# EAGLE board Telemetry Board rev0 (EAGLE 7.6.0)
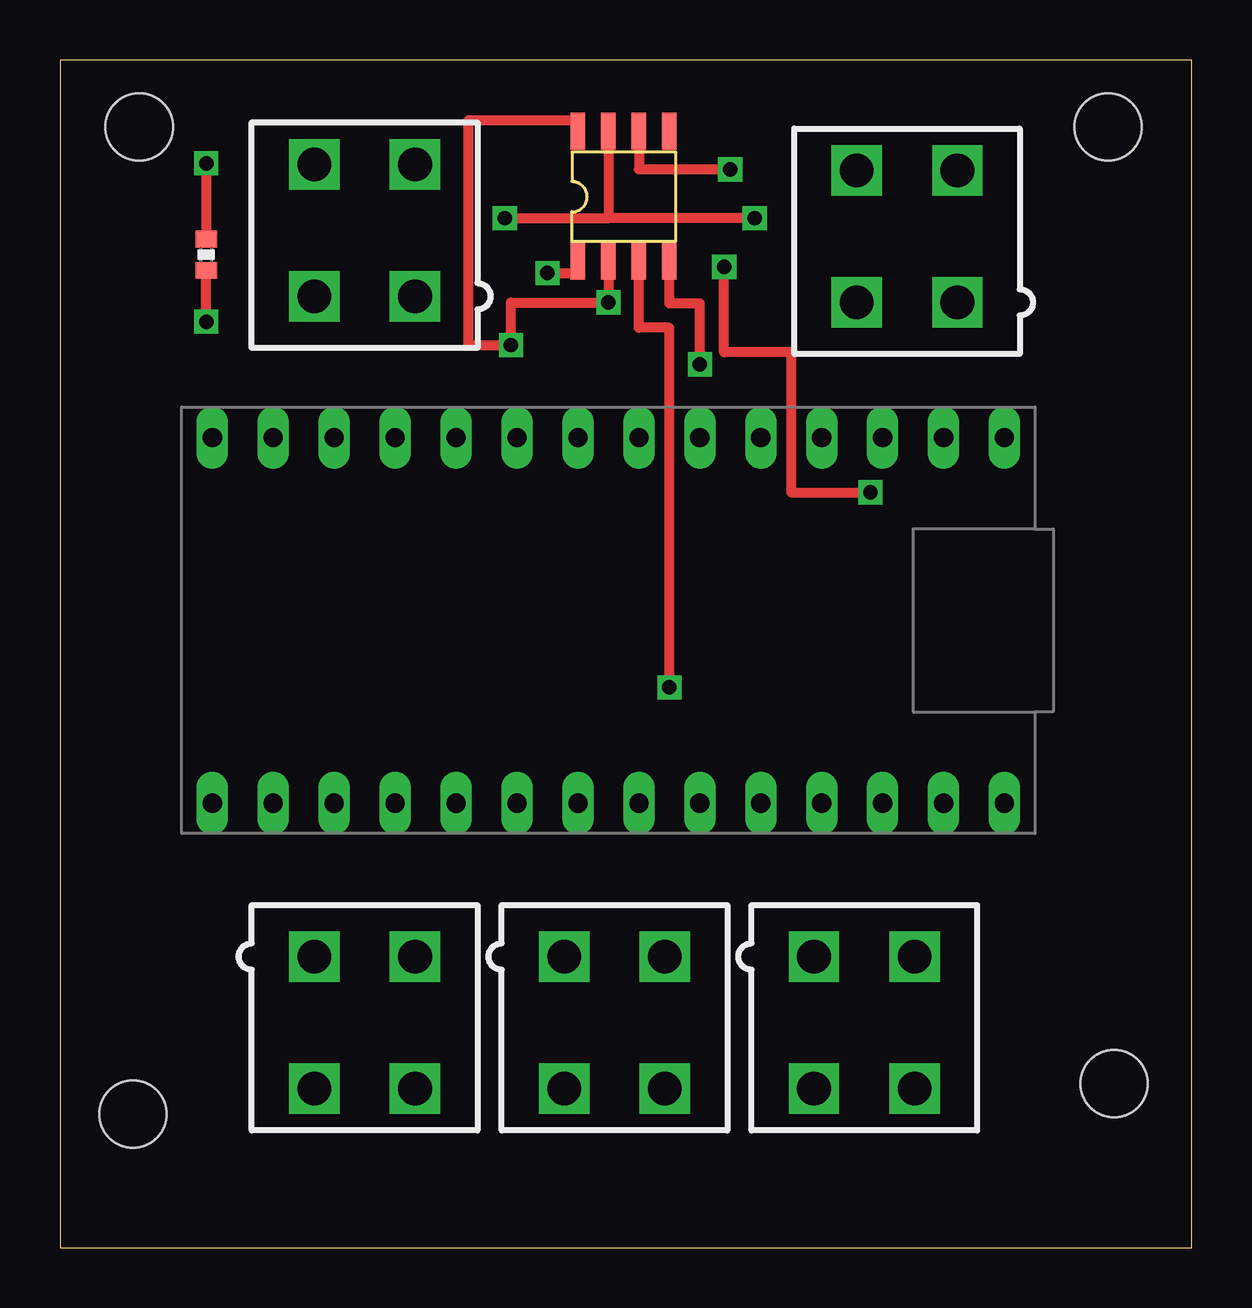
[diagram p0: board, top side]
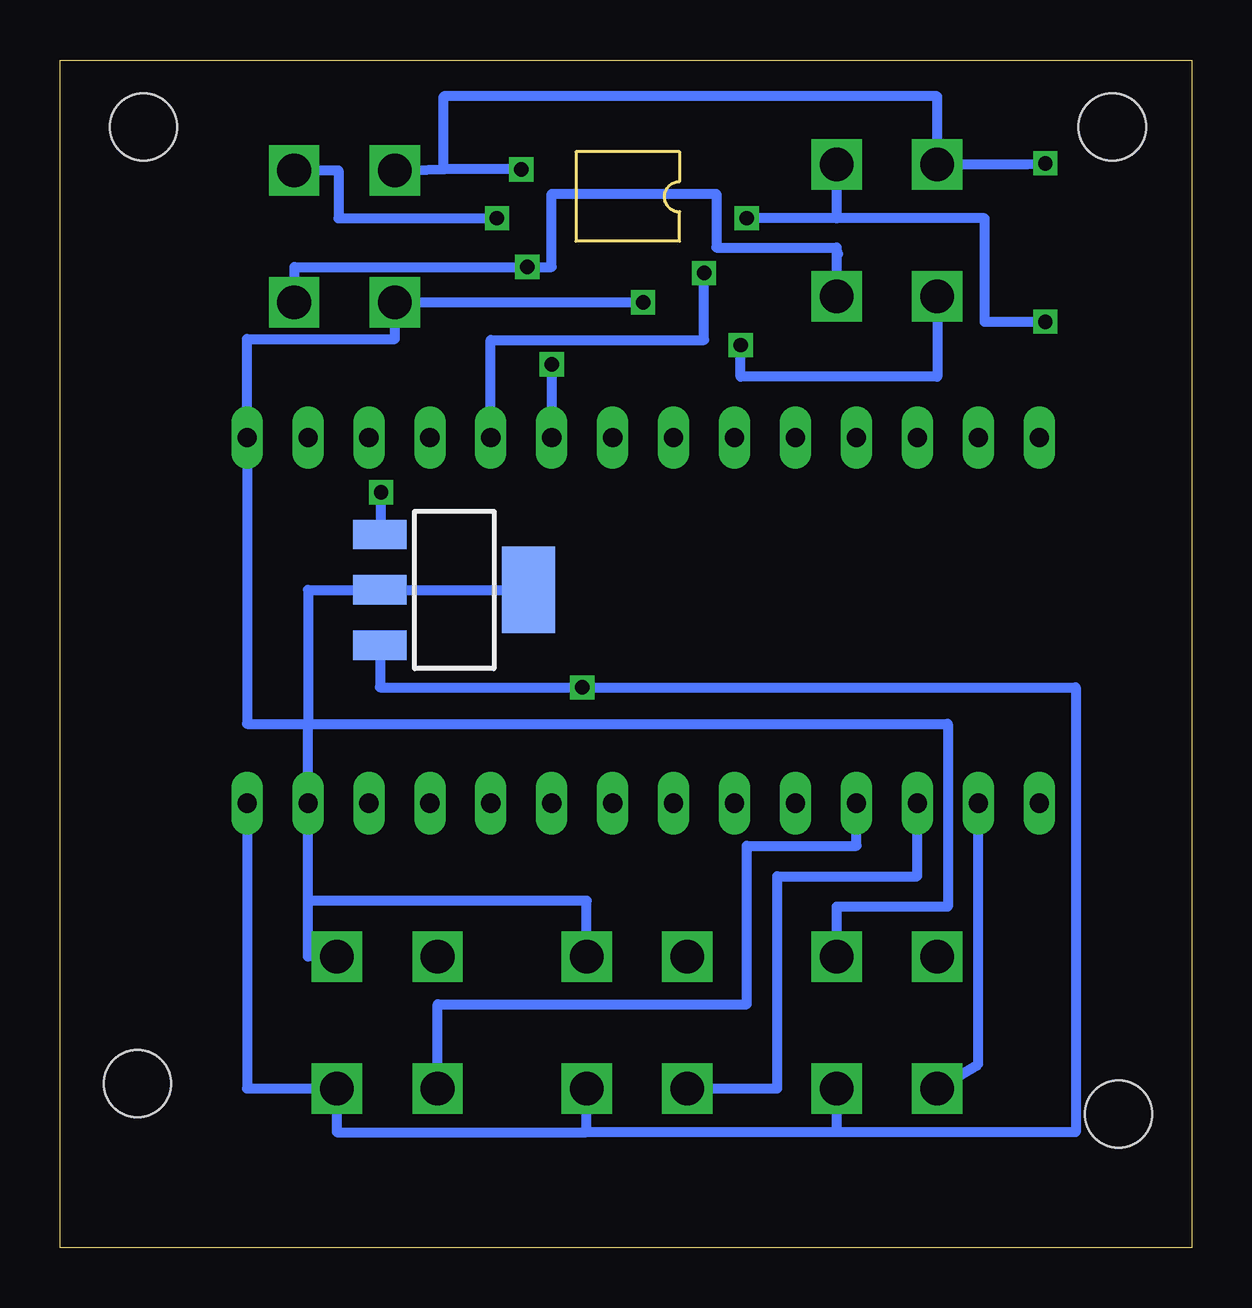
[diagram p1: board, bottom side, seen from below]

Size 47.17 x 49.52 mm. Coordinates in mm from the lower left corner, seen from the top.
Outline: 0,0 47.17,0 47.17,49.52 0,49.52 0,0
Copper layers (1*16): Top 0.035mm / dielectric 1.5mm / Bottom 0.035mm
Design rules "default": minimum track width 10mil, minimum drill 24mil, track to track 8mil, track to pad 8mil, pad to pad 8mil, via to via 8mil, smd to smd 8mil, copper to edge 40mil, drill to drill 8mil, minimum pad ring 10mil, minimum via ring 8mil, stop-mask expansion 4mil, vias tented up to drill 0mil, thermal gap 10mil
Holes 2.8 mm at 3.3,46.74 3.05,5.59 43.69,46.74 43.94,6.86

## Footprints (pad centres in the part's own frame; a part is rotated, then mirrored left to right if it is on the bottom)
0402-RES = smd 0.7 x 0.9: 1 -0.65,0; 2 0.65,0
MINIFIT_5566-4 = drill 1.4 square: 1 2.1,-2.75; 2 -2.1,-2.75; 3 2.1,2.75; 4 -2.1,2.75
TEENSY_3.2_SIMPLE = drill 0.8 long: 3.3V 16.51,29.21; A0 16.51,3.81; A1 16.51,6.35; A2 16.51,8.89; A3 16.51,11.43; A4 16.51,13.97; A5 16.51,16.51; A6 16.51,19.05; A7 16.51,21.59; A8 16.51,24.13; A9 16.51,26.67; AGND 16.51,31.75; D0(RX1) 1.27,31.75; D1(TX1) 1.27,29.21; D2 1.27,26.67; D3(CANTX) 1.27,24.13; D4(CANRX) 1.27,21.59; D5 1.27,19.05; D6 1.27,16.51; D7(RX3) 1.27,13.97; D8(TX3) 1.27,11.43; D9(RX2) 1.27,8.89; D10(TX2) 1.27,6.35; D11 1.27,3.81; D12 1.27,1.27; D13 16.51,1.27; GND 1.27,34.29; VIN 16.51,34.29
SOIC08 = smd 0.6 x 1.55: 1 0,0; 2 1.27,0; 3 2.54,0; 4 3.81,0; 5 3.81,5.4; 6 2.54,5.4; 7 1.27,5.4; 8 0,5.4
SOT223 = smd 1.219 x 2.235: 1 -2.311,-3.099; 2 0,-3.099; 3 2.311,-3.099 | smd 3.6 x 2.2: 4 0,3.099

## Placement (x,y rotation side)
120  [0402-RES]  6.1,41.4 270 top
ADAD  MINIFIT_5566-4  [MINIFIT_5566-4]  12.7,42.42 0 top
U$1  TEENSY_3.2_SIMPLE  [TEENSY_3.2_SIMPLE]  5.08,35.05 270 top
U$2  MCP2551SOIC  [SOIC08]  21.59,41.15 0 top
U$3  [SOT223]  30.73,27.43 270 bottom
X1  Suspension Sensor  [MINIFIT_5566-4]  33.53,9.4 180 top
X2  Wheel Sensor  [MINIFIT_5566-4]  12.7,9.4 180 top
X3  Tire Temperature Sensor  [MINIFIT_5566-4]  23.11,9.4 180 top
X5  MINIFIT_5566-4  [MINIFIT_5566-4]  35.31,42.16 0 top

## Library data of the parts
120 = HyTech
ADAD X1-X3 X5 = HyTechDevices; OC_FARNELL: unknown; OC_NEWARK: unknown
U$1-U$3 = HyTechDevices

## Nets
N$1: ADAD.1 U$3.1 X5.1
N$3: 120.2 ADAD.3 U$2.7 X5.3
N$4: 120.1 ADAD.4 U$2.6 X5.4
N$6: ADAD.2 U$1.AGND U$1.GND U$2.2 U$2.8 U$3.2 U$3.4 X1.2 X2.2 X3.2 X5.2
N$9: U$1.D3(CANTX) U$2.1
N$10: U$1.D4(CANRX) U$2.4
N$12: U$1.A1 X3.3
N$13: U$1.VIN U$2.3 U$3.3 X1.4 X2.4 X3.4
N$16: U$1.A0 X2.3
N$19: U$1.A2 X1.3

## Tracks (layer width: path | path; a pad name or v marks a point on that pad's centre or on a via)
N$1  (via drill 0.6)
  Top 0.406: v27.69,40.89 27.69,37.34 30.48,37.34 30.48,31.5 v33.78,31.5
  Bottom 0.406: 14.8,41.7 19.81,41.7 19.81,43.94 26.67,43.94 26.67,40.89 v27.69,40.89 37.41,40.89 X5.1 | 14.73,41.45 14.8,41.7 | 14.8,41.7 ADAD.1 | U$3.1 33.78,29.74 v33.78,31.5
N$3  (via drill 0.6)
  Top 0.406: U$2.7 22.86,42.93 | v18.54,42.93 22.86,42.93 | v28.96,42.93 22.86,42.93 | v6.1,38.61 120.2
  Bottom 0.406: v28.96,42.93 35.56,42.93 35.56,44.91 X5.3 | v6.1,38.61 8.64,38.61 8.64,42.93 14.8,42.93 | 14.8,42.93 v18.54,42.93 | ADAD.3 14.8,42.93
N$4  (via drill 0.6)
  Top 0.406: v6.1,45.21 120.1 | U$2.6 24.13,44.96 v27.94,44.96
  Bottom 0.406: v27.94,44.96 31.17,44.96 | X5.4 31.17,44.96 | 31.17,44.96 31.17,48.01 10.6,48.01 ADAD.4 6.86,45.17 v6.1,45.21
N$6  (via drill 0.6)
  Top 0.406: U$2.8 21.59,46.99 17.02,46.99 17.02,37.64 v18.8,37.64 18.8,39.41 v22.86,39.41 U$2.2
  Bottom 0.406: U$3.4 U$3.2 36.83,27.43 36.83,21.84 | v22.86,39.41 X5.2 33.21,37.89 39.37,37.89 U$1.GND 39.37,21.84 36.83,21.84 | ADAD.2 10.6,36.32 18.8,36.32 v18.8,37.64 | 36.83,21.84 U$1.AGND 36.83,14.48 | 36.83,21.84 10.16,21.84 10.16,14.22 14.8,14.22 X2.2 | X1.2 36.83,12.15 36.83,14.48 | X3.2 25.21,14.48 36.83,14.48
N$9  (via drill 0.6)
  Top 0.406: v20.32,40.64 21.59,40.64 U$2.1
  Bottom 0.406: U$1.D3(CANTX) 29.21,37.85 20.32,37.85 v20.32,40.64
N$10  (via drill 0.6)
  Top 0.406: v26.67,36.83 26.67,39.37 25.4,39.37 U$2.4
  Bottom 0.406: v26.67,36.83 U$1.D4(CANRX)
N$12
  Bottom 0.406: X3.3 17.27,6.65 17.27,15.49 11.43,15.49 U$1.A1
N$13  (via drill 0.6)
  Top 0.406: v25.4,23.37 25.4,38.35 24.13,38.35 U$2.3
  Bottom 0.406: U$3.3 33.83,23.37 v25.4,23.37 4.83,23.37 4.83,4.83 14.8,4.83 | U$1.VIN 39.37,6.65 X1.4 35.63,4.83 25.21,4.83 | 25.21,4.83 X3.4 | X2.4 14.8,4.83 | 14.8,4.83 25.21,4.83
N$16
  Bottom 0.406: X2.3 8.89,7.66 U$1.A0
N$19
  Bottom 0.406: X1.3 31.43,10.16 18.54,10.16 18.54,16.76 13.97,16.76 U$1.A2